# Altium PCB 24V Multiphase Buck.PcbDoc
Units mil, origin at the board's own origin, x right, y up, seen from the top; angles counter-clockwise.
Board outline 3543.31 x 3937.01 mil, 4 copper layers (TOP, L3 - POWER, L2 - GND, BOT), stack 23.756 mil thick; 82 components, 31 nets, 185 pads, 143 vias.
Unrouted connection lines stored in the file: 77.
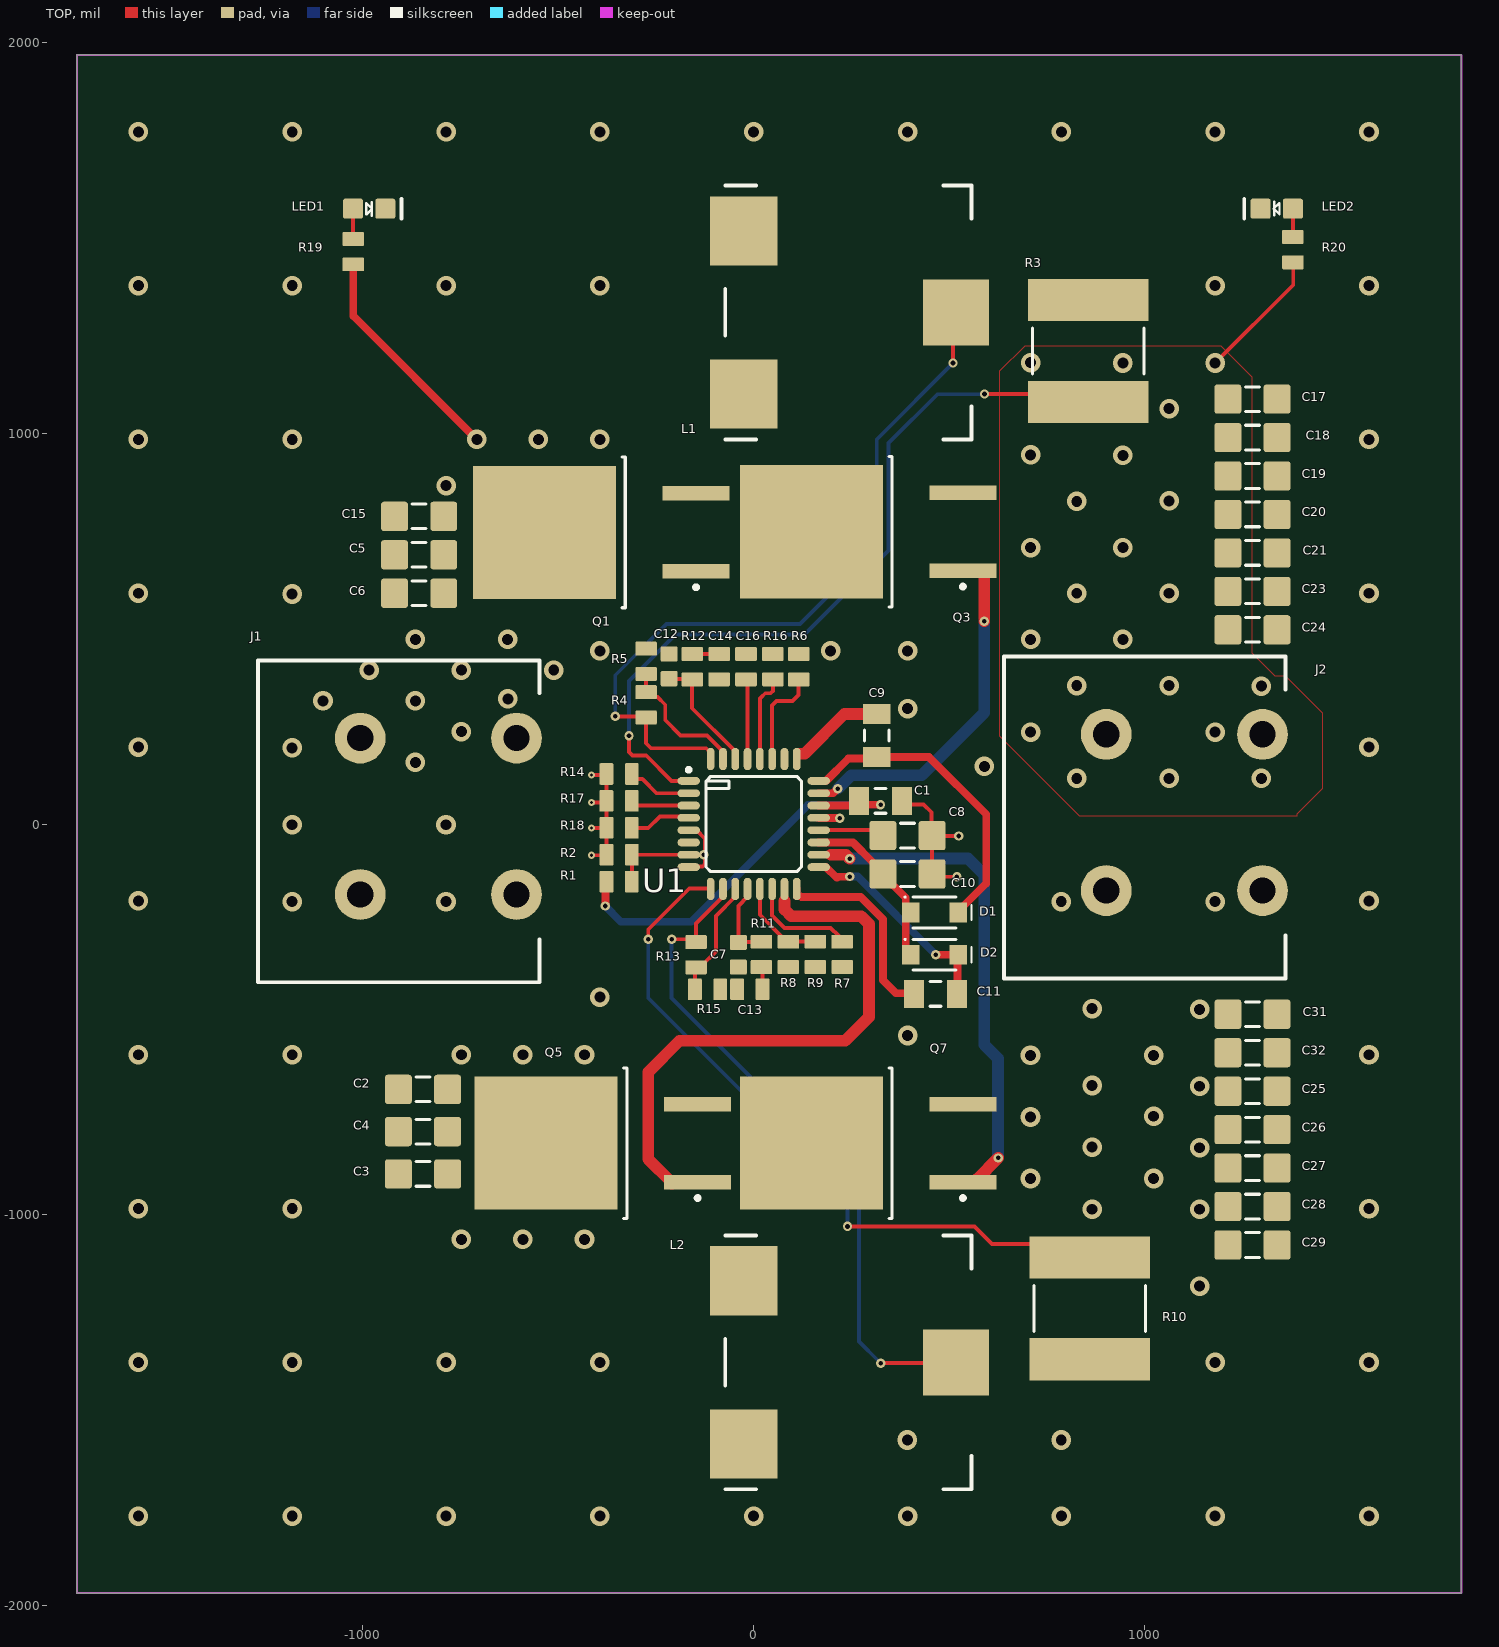
[diagram p0: TOP view]
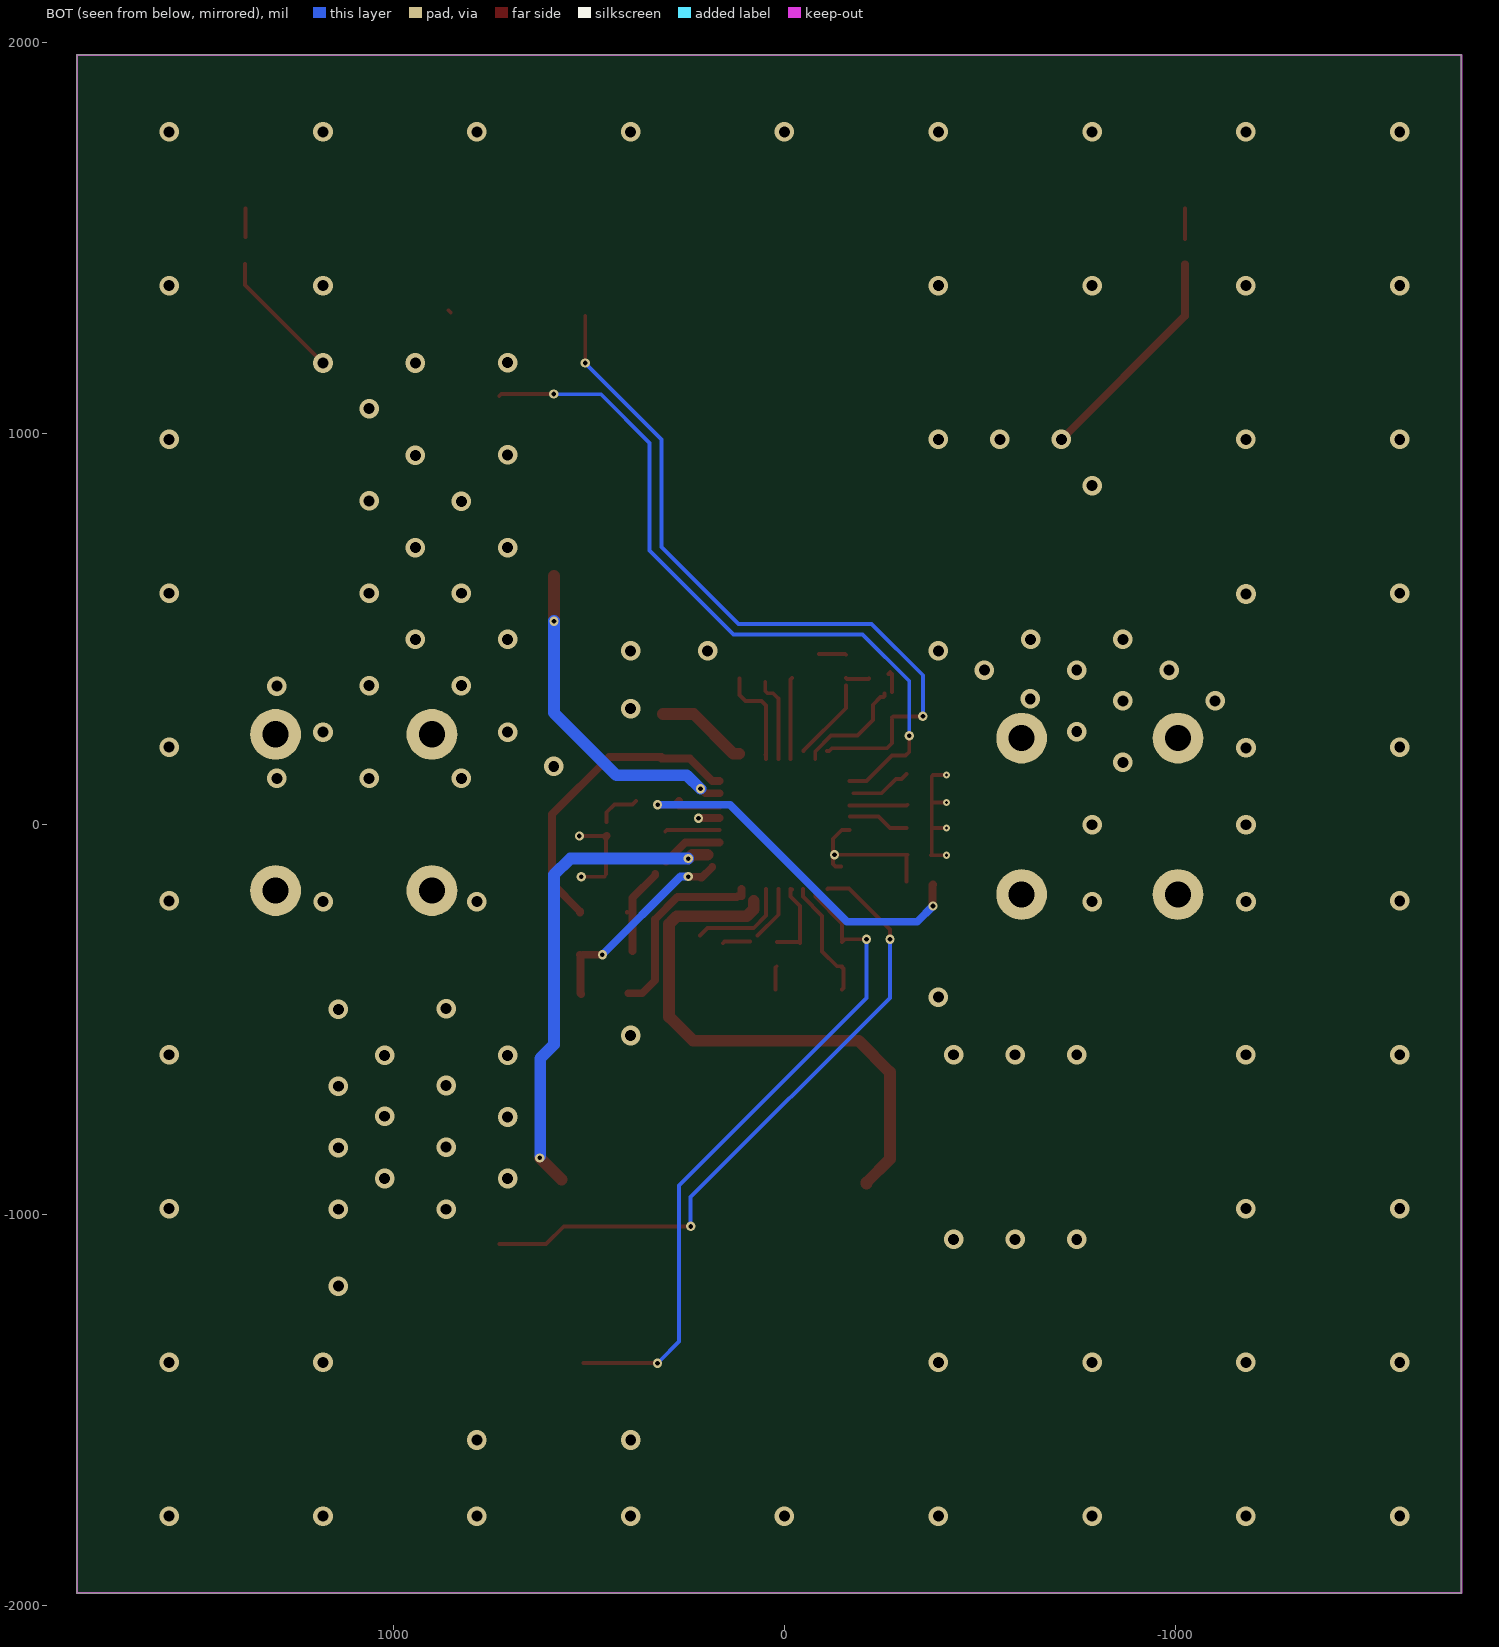
[diagram p1: BOT view, seen from below]
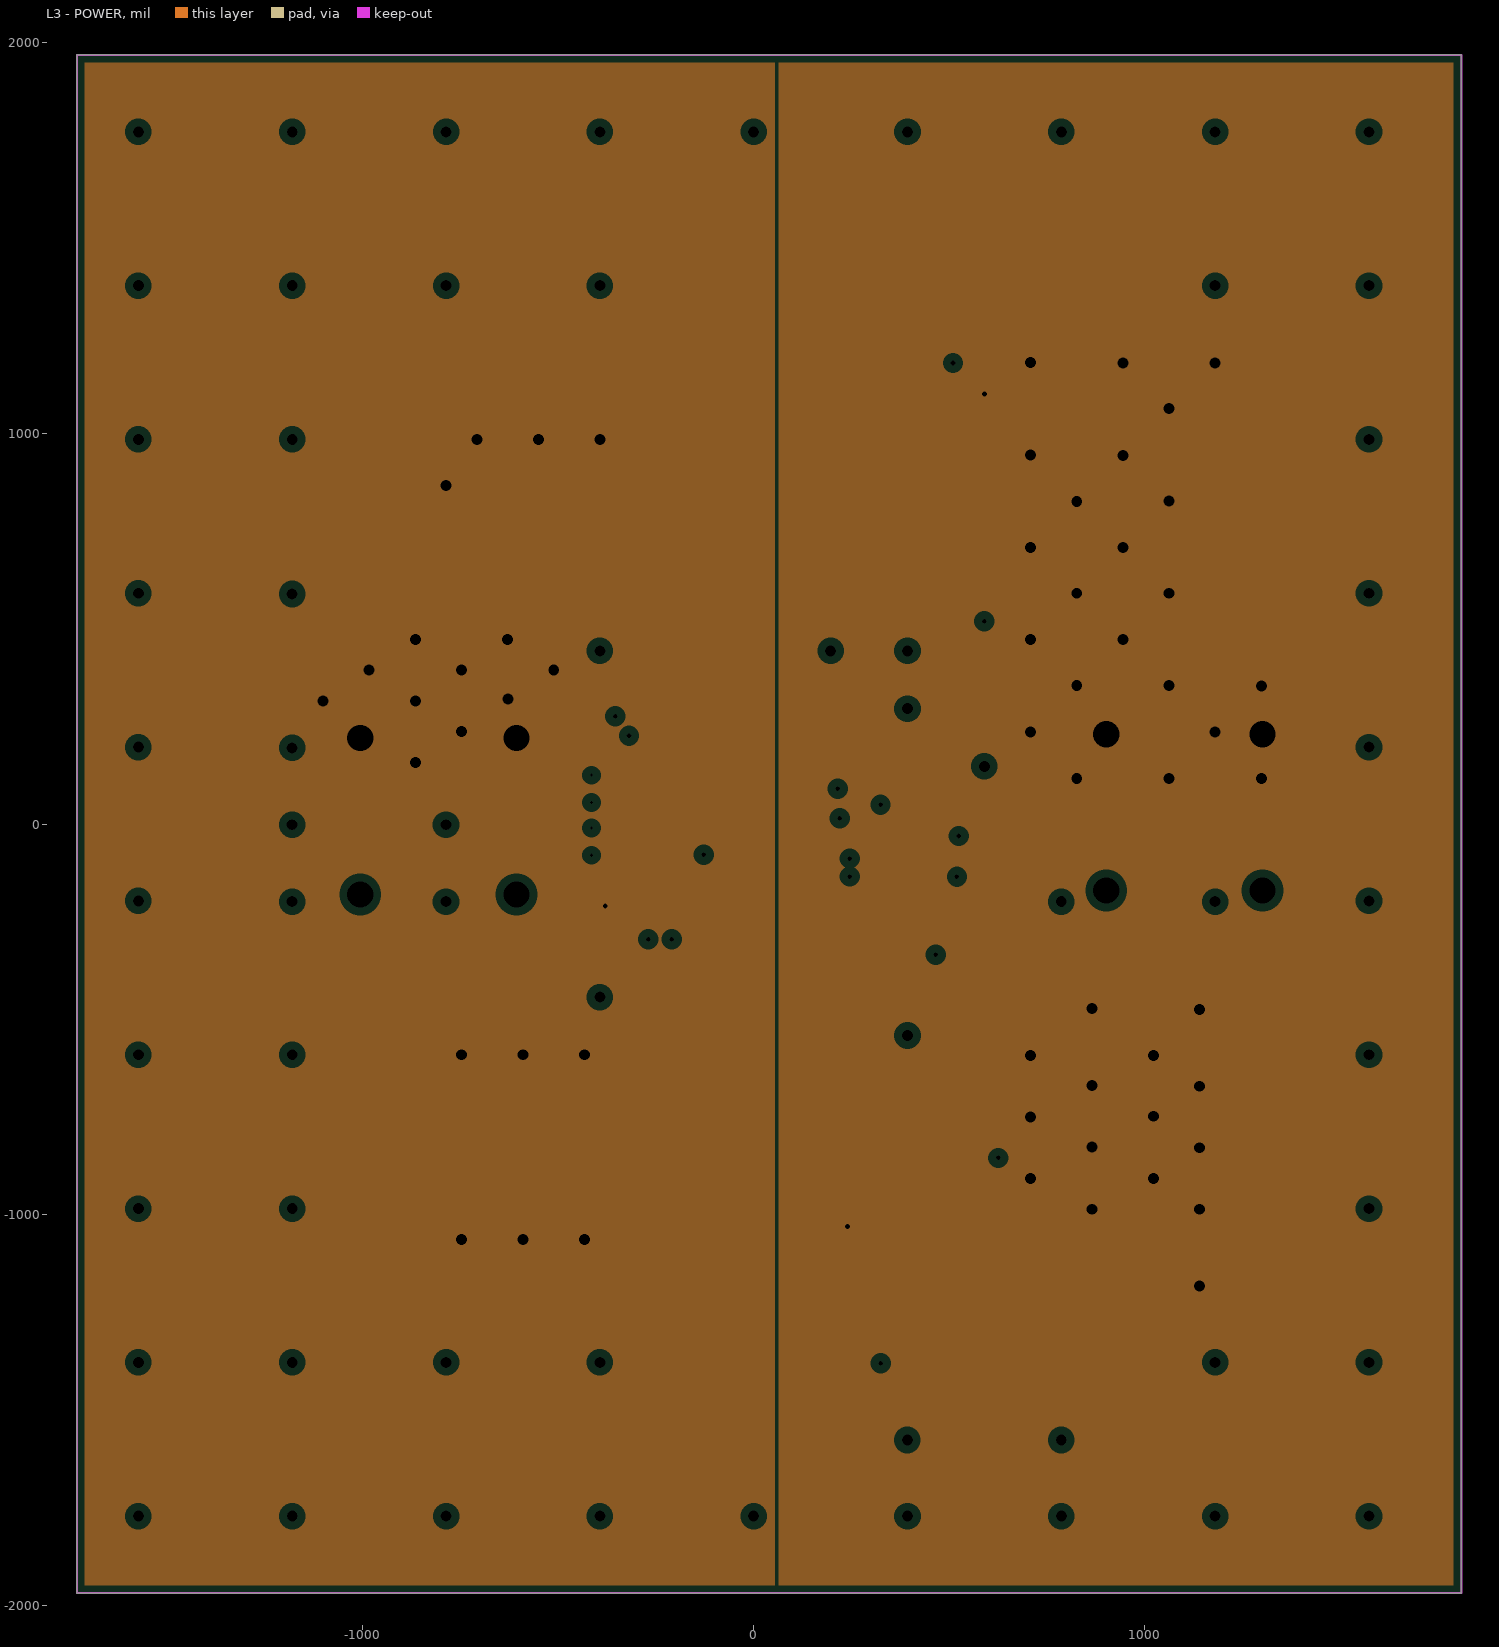
[diagram p2: L3 - POWER, clearances drawn from the general rule]
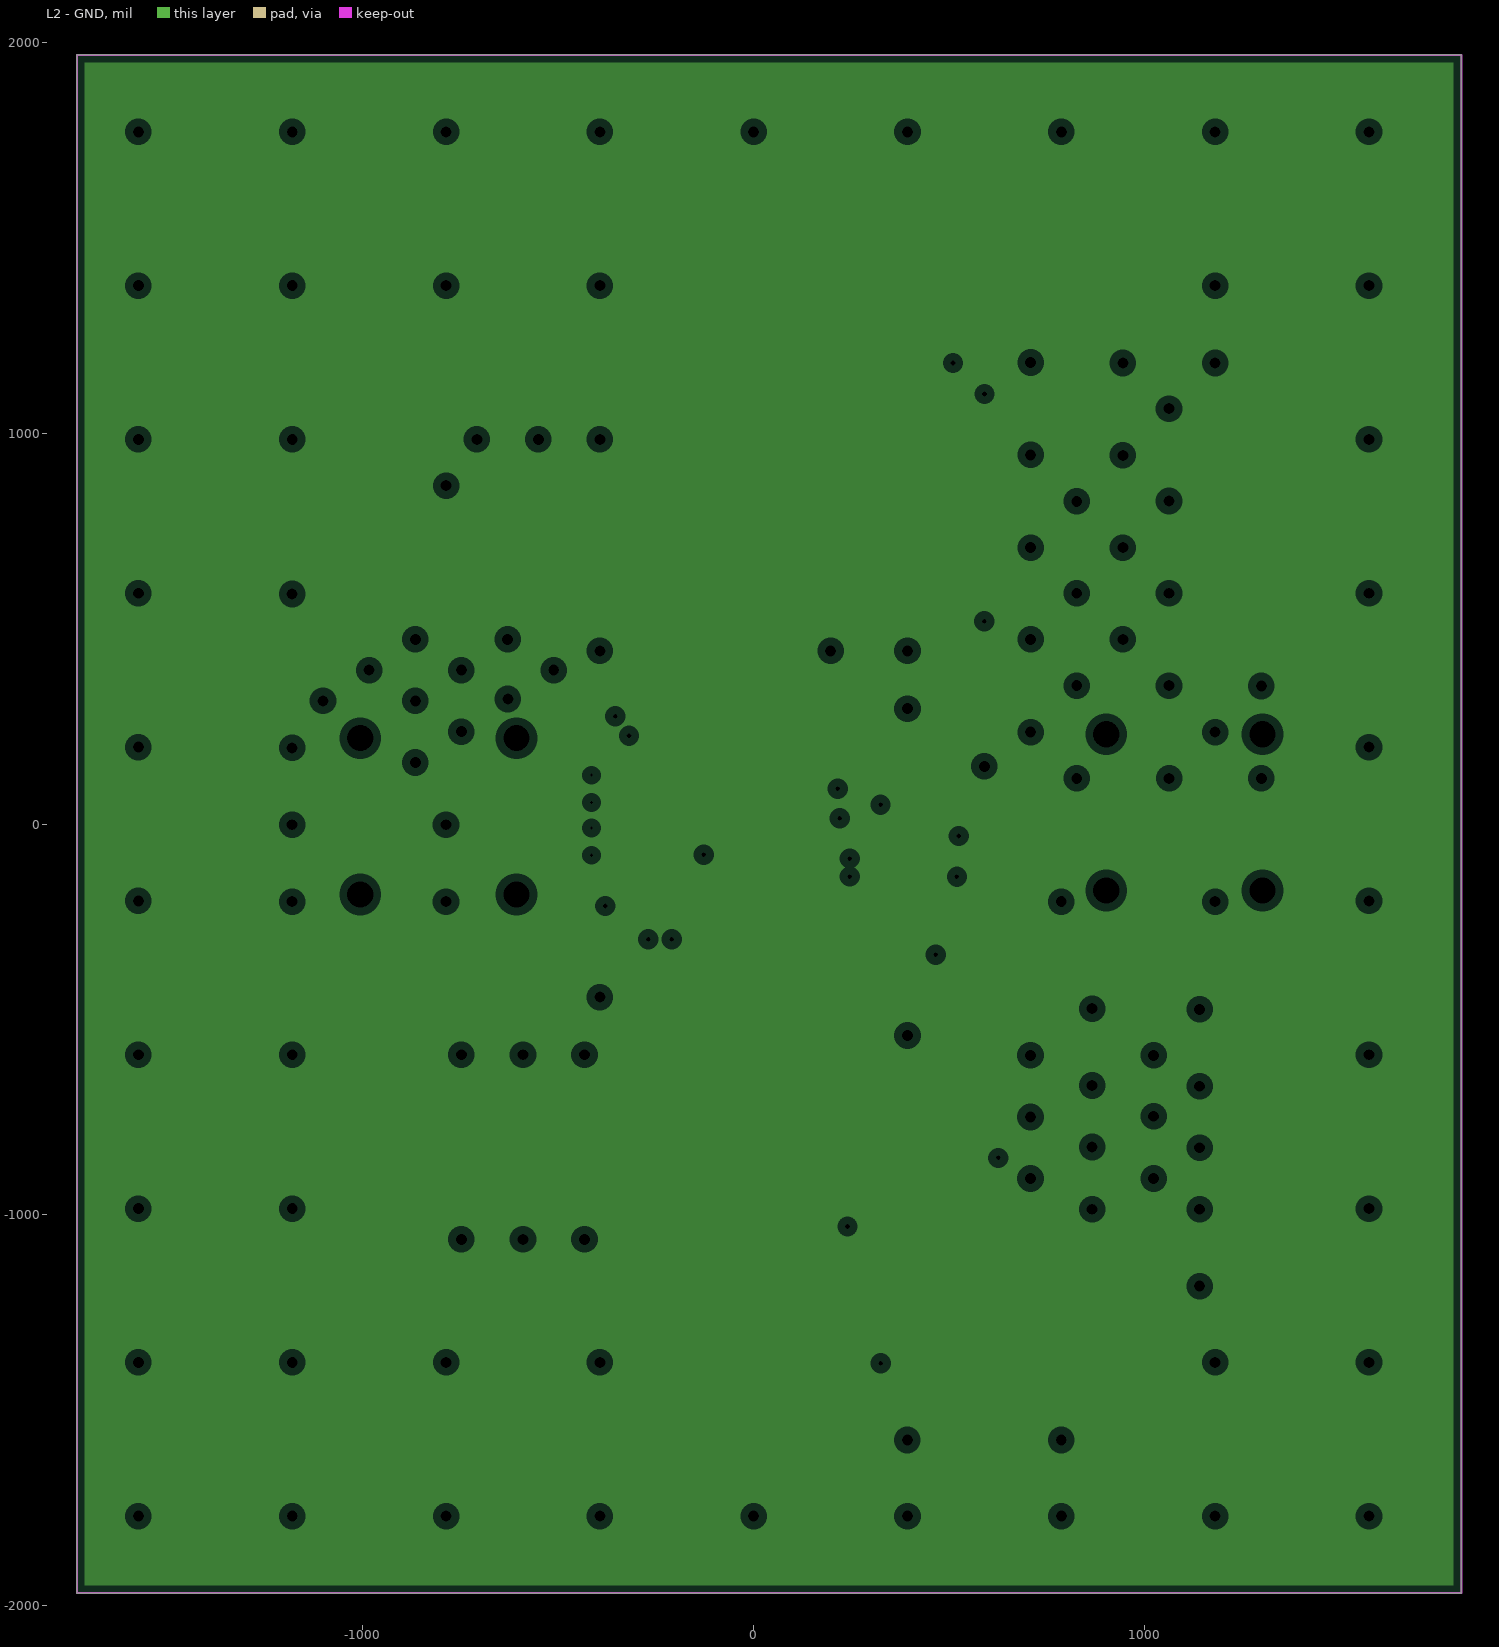
[diagram p3: L2 - GND, clearances drawn from the general rule]

## Layer stack, top to bottom
Top Solder: solder mask 0.4, Solder Resist, Dk 3.5
TOP: signal copper 1.4
Dielectric 2: prepreg 2.8, PP-006, Dk 4.1
L3 - POWER: plane copper 1.378, net (Multiple Nets)
Dielectric 1: dielectric 12.6, FR-4, Dk 4.8
L2 - GND: plane copper 1.378
Dielectric 3: prepreg 2.8, PP-006, Dk 4.1
BOT: signal copper 1.4
Bottom Solder: solder mask 0.4, Solder Resist, Dk 3.5

## Board outline
-1732.28,-1968.5 -1732.28,1968.5 1811.02,1968.5 1811.02,-1968.5

## Design rules (kind name [scope] priority, off if disabled: settings)
BoardOutlineClearance [All] p1: gap=20 ignorepadtopadclearanceinfootprint=FALSE except(5: Text-OutlineEdge Text-CavityEdge Text-CutoutEdge Text-SplitBarrior Text-SplitContinuation; 25: Track-OutlineEdge Track-CavityEdge Track-CutoutEdge Track-SplitBarrior Track-SplitContinuation)
Clearance "High Voltage Internal" [InNetClass('High_Voltage_Internal')  and OnLayer('Power')] p1: gap=20 ignorepadtopadclearanceinfootprint=TRUE
Clearance "High Voltage External" [InNetClass('High_Voltage')  and OnLayer('Signal')] p2: gap=12 ignorepadtopadclearanceinfootprint=TRUE
Clearance Clearance_1 [All] p3: gap=10 ignorepadtopadclearanceinfootprint=TRUE except(0: Arc-Text Track-Text Text-Hole; 5: Track-Track SMDPad-SMDPad Text-Text; 7: SMDPad-Region; 8: Arc-Arc Arc-Track Arc-SMDPad Arc-Hole Track-SMDPad Track-Region Track-Hole SMDPad-THPad SMDPad-Fill SMDPad-Poly SMDPad-Text SMDPad-Hole THPad-Hole Via-Hole Fill-Hole Poly-Hole Region-Region Region-Hole; 20: THPad-THPad Via-Via)
ComponentClearance [All] p1: gap=10 collisioncheckmode=3 verticalgap=200 showdistances=FALSE
DiffPairsRouting [All] p1: maxlimit=10 minlimit=8 mostfreqgap=10 toplayer_minwidth=10 toplayer_maxwidth=10 toplayer_prefwidth=10 bottomlayer_minwidth=10 bottomlayer_maxwidth=10 bottomlayer_prefwidth=10 maxuncoupledlength=500
Height [All] p1: minheight=0 maxheight=50000 prefheight=500
HoleSize [All] p1: absolutevalues=TRUE maxlimit=200 minlimit=10 maxpercent=80.000 minpercent=20.000
HoleToHoleClearance [All] p1: gap=20 allowstackedmicrovias=TRUE
MinimumAnnularRing [All] p1: minimumring=5
MinimumSolderMaskSliver [All] p1: minsoldermaskwidth=3
PlaneClearance [All] p1: clearance=20
PlaneConnect PlaneConnect_highpwr [(InNet('24V') OR InNet('VBAT'))] p1: planeconnectstyle=Direct reliefexpansion=20 reliefentries=4 reliefconductorwidth=10 reliefairgap=10
PlaneConnect PlaneConnect_GNDCON [(InNet('GND') AND (InComponent('J1') OR InComponent('J2')))] p2: planeconnectstyle=Direct reliefexpansion=20 reliefentries=4 reliefconductorwidth=10 reliefairgap=10
PlaneConnect [All] p3: pad.planeconnectstyle=Relief pad.reliefexpansion=20 pad.reliefentries=4 pad.reliefconductorwidth=10 pad.reliefairgap=10 via.planeconnectstyle=Direct via.reliefexpansion=20 via.reliefentries=4 via.reliefconductorwidth=10 via.reliefairgap=10
PolygonConnect PolygonConnect_Via [IsVia] p1: connectstyle=Direct reliefconductorwidth=10 reliefentries=4 polygonreliefangle="90 Angle" airgapwidth=10
PolygonConnect [All] p2: connectstyle=Direct reliefconductorwidth=10 reliefentries=4 polygonreliefangle="90 Angle" airgapwidth=10
RoutingVias [All] p1: holewidth=12 width=24 viastyle="Through Hole" minholewidth=6 minwidth=12 maxholewidth=24 maxwidth=50
SilkToSilkClearance [All] p1: silktosilkclearance=2
SilkToSolderMaskClearance [IsPad] p1: minsilkscreentomaskgap=0.5 clearancetoexposedcopper=TRUE
SolderMaskExpansion [All] p1: expansion=2 istentingtop=FALSE
Width Width_1 [All] p1: maxlimit=100 minlimit=5 preferedwidth=10 minimp=50.000000 maximp=50.000000 favimp=50.000000
20 further rules are at their usual default settings.

## Components (designator, comment, footprint, x,y, rotation, side; value= is the part's Value field where it differs from the comment)
C1 "CAP_1uF_100V_1206" CAPC3216X190X50NL20T25 324.8,59.06 r180 top value=1μF
C2 "CAP_22uF_35V_1206" CAP1206 -846.46,-679.13 r0 top value=22μF
C3 "CAP_22uF_35V_1206" CAP1206 -846.46,-895.67 r0 top value=22μF
C4 "CAP_22uF_35V_1206" CAP1206 -846.46,-787.4 r0 top value=22μF
C5 "CAP_22uF_35V_1206" CAP1206 -856.3,688.98 r0 top value=22μF
C6 "CAP_22uF_35V_1206" CAP1206 -856.3,590.55 r0 top value=22μF
C7 "CAP_82pF_50V_0603" CAP0603 -39.37,-334.65 r90 top value=82pF
C8 "CAP_2.2uF_50V_1206" CAP1206 393.7,-29.53 r180 top value=2.2μF
C9 "CAP_1uF_100V_1206" CAPC3216X190X50NL20T25 314.96,226.38 r270 top value=1μF
C10 "CAP_4.7uF_50V_1206" CAP1206 393.7,-127.95 r180 top value=4.7μF
C11 "CAP_1uF_100V_1206" CAPC3216X190X50NL20T25 465,-435 r0 top value=1μF
C12 "CAP_82pF_50V_0603" CAP0603 -216.54,403.54 r270 top value=82pF
C13 "CAP_0.015uF_50V_0805" CAP0805 -9.84,-423.23 r0 top value=0.015µF
C14 "CAP_0.015uF_50V_0805" CAP0805 -88.58,402.56 r90 top value=0.015µF
C15 "CAP_22uF_35V_1206" CAP1206 -856.3,787.4 r0 top value=22μF
C16 "CAP_6200pF_50V_0805" CAP0805 -19.68,402.56 r270 top
C17 "CAP_22uF_35V_1206" CAP1206 1276.57,1087.52 r180 top value=22μF
C18 "CAP_22uF_35V_1206" CAP1206 1276.57,989.09 r180 top value=22μF
C19 "CAP_22uF_35V_1206" CAP1206 1276.57,890.67 r180 top value=22μF
C20 "CAP_22uF_35V_1206" CAP1206 1276.57,792.24 r180 top value=22μF
C21 "CAP_22uF_35V_1206" CAP1206 1276.57,693.82 r180 top value=22μF
C23 "CAP_NU_1206" CAP1206 1276.57,595.39 r180 top value=NU
C24 "CAP_NU_1206" CAP1206 1276.57,496.97 r180 top value=NU
C25 "CAP_22uF_35V_1206" CAP1206 1276.57,-683.82 r180 top value=22μF
C26 "CAP_22uF_35V_1206" CAP1206 1276.57,-782.24 r180 top value=22μF
C27 "CAP_22uF_35V_1206" CAP1206 1276.57,-880.67 r180 top value=22μF
C28 "CAP_22uF_35V_1206" CAP1206 1276.57,-979.09 r180 top value=22μF
C29 "CAP_22uF_35V_1206" CAP1206 1276.57,-1077.52 r180 top value=22μF
C31 "CAP_NU_1206" CAP1206 1276.57,-486.97 r180 top value=NU
C32 "CAP_NU_1206" CAP1206 1276.57,-585.39 r180 top value=NU
D1 "DIO_SCHOTTKY_100V_1A" SOD-123FL 462.6,-226.38 r0 top
D2 "DIO_SCHOTTKY_100V_1A" SOD-123FL 462.6,-334.65 r0 top
J1 "CON_2POS_SCREW_TERM" CON_2POS_SCREW_TERM_65A -807.09,19.69 r270 top
J2 "CON_2POS_SCREW_TERM" CON_2POS_SCREW_TERM_65A 1102.36,29.53 r270 top
L1 "IND_10uH_33A_SMD" IND_B82559B7103A027 246.06,1309.06 r270 top
L2 "IND_10uH_33A_SMD" IND_B82559B7103A027 246.06,-1377.95 r270 top
LED1 "LED_RED" LED_0805_RED -984.25,1574.8 r0 top
LED2 "LED_RED" LED_0805_RED 1338.58,1574.8 r180 top
MH1 "MOUNTING_HOLE_M3" MOUNTING_HOLE_3mm 3297.24,1889.76 r0 top
MH2 "MOUNTING_HOLE_M3" MOUNTING_HOLE_3mm 3326.77,-1988.19 r0 top
MH3 "MOUNTING_HOLE_M3" MOUNTING_HOLE_3mm -3208.66,1860.24 r0 top
MH4 "MOUNTING_HOLE_M3" MOUNTING_HOLE_3mm -3257.87,-1938.98 r0 top
Q1 "NMOS_150V_114A" NMOS_DPAK263-3-2 -147.64,646.46 r180 top
Q3 "NMOS_150V_114A" NMOS_DPAK263-3-2 535.43,648.03 r180 top
Q5 "NMOS_150V_114A" NMOS_DPAK263-3-2 -143.7,-916.93 r180 top
Q7 "NMOS_150V_114A" NMOS_DPAK263-3-2 535.43,-916.93 r180 top
R1 "RES_191kΩ_0805_1%" RES0805 -344.49,-147.64 r180 top value=191kΩ
R2 "RES_10kΩ_0805_5%" RES0805 -344.49,-78.74 r0 top value=10kΩ
R3 "RES_5mΩ_2728_1%" RES2728 856.3,1210.63 r270 top value=5mΩ
R4 "RES_187kΩ_0805_0.1%" RES0805 -275.59,305.12 r270 top value=187kΩ
R5 "RES_6.49kΩ_0805_1%" RES0805 -275.59,416.34 r270 top value=6.49kΩ
R6 "RES_10kΩ_0805_5%" RES0805 115,402.52 r270 top value=10kΩ
R7 "RES_10kΩ_0805_5%" RES0805 226.38,-333.66 r90 top value=10kΩ
R8 "RES_187kΩ_0805_0.1%" RES0805 88.58,-333.66 r270 top value=187kΩ
R9 "RES_6.49kΩ_0805_1%" RES0805 157.48,-333.66 r90 top value=6.49kΩ
R10 "RES_5mΩ_2728_1%" RES2728 860,-1240 r90 top value=5mΩ
R11 "RES_13.7kΩ_0805_1%" RES0805 19.69,-333.66 r90 top value=13.7kΩ
R12 "RES_13.7kΩ_0805_1%" RES0805 -157.48,402.56 r270 top value=13.7kΩ
R13 "RES_187kΩ_0805_0.1%" RES0805 -147.64,-334.65 r90 top value=187kΩ
R14 "RES_71.5kΩ_0805_1%" RES0805 -344.49,127.95 r0 top value=71.5kΩ
R15 "RES_6.49kΩ_0805_1%" RES0805 -118.11,-423.23 r180 top value=6.49kΩ
R16 "RES_402Ω_0805_1%" RES0805 49.21,402.56 r270 top value=402Ω
R17 "RES_402Ω_0805_1%" RES0805 -344.49,59.06 r0 top value=402Ω
R18 "RES_0Ω_0805" RES0805 -344.49,-9.84 r0 top value=0Ω
R19 "RES_4.7kΩ_0805_5%" RES0805 -1025,1465 r90 top value=4.7kΩ
R20 "RES_2.2kΩ_0805_5%" RES0805 1380,1470 r90 top value=2.2kΩ
TP1 "TESTPOINT_LOOP" TESTPOINT_LOOP 7947.28,-1970.13 r0 top
TP2 "TESTPOINT_LOOP" TESTPOINT_LOOP 8158.28,-1970.13 r0 top
TP3 "TESTPOINT_LOOP" TESTPOINT_LOOP 7486.28,-1970.13 r0 top
TP4 "TESTPOINT_LOOP" TESTPOINT_LOOP 7293.31,-1958.66 r0 top
TP5 "TESTPOINT_LOOP" TESTPOINT_LOOP -2923.23,1082.68 r0 top
TP6 "TESTPOINT_1MM_CIRCLE" TESTPOINT_CIRCLE_1MM 2763.21,-1397.8 r90 top
TP7 "TESTPOINT_1MM_CIRCLE" TESTPOINT_CIRCLE_1MM 3300.93,-1840.71 r90 top
TP8 "TESTPOINT_1MM_CIRCLE" TESTPOINT_CIRCLE_1MM 3070.93,-1840.71 r90 top
TP9 "TESTPOINT_1MM_CIRCLE" TESTPOINT_CIRCLE_1MM 2279.93,-1840.71 r90 top
TP10 "TESTPOINT_1MM_CIRCLE" TESTPOINT_CIRCLE_1MM 5415.28,-1939.13 r90 top
TP11 "TESTPOINT_1MM_CIRCLE" TESTPOINT_CIRCLE_1MM 5155.28,-1939.13 r90 top
TP12 "TESTPOINT_1MM_CIRCLE" TESTPOINT_CIRCLE_1MM 2993.21,-1397.8 r90 top
TP14 "TESTPOINT_1MM_CIRCLE" TESTPOINT_CIRCLE_1MM 2789.93,-1840.71 r90 top
TP15 "TESTPOINT_1MM_CIRCLE" TESTPOINT_CIRCLE_1MM 2509.93,-1840.71 r90 top
TP17 "TESTPOINT_1MM_CIRCLE" TESTPOINT_CIRCLE_1MM 4875.28,-1939.13 r90 top
U1 "MAX17559ACJ+" IC_32-TQFP 0,0 r0 top

## Footprints (in the part's own frame and the unit in brackets; to place one, negate y for a bottom-side part, rotate by r counter-clockwise, add the part's x,y. Pads: shape width x height; smd on the part's side, far side on the other; paste and mask are expansions set on the pad)
CAP0603 [mm]
  rrect20% 1x1.1 smd: 1(-0.8,0) 2(0.8,0)
  body extent -0.87,-0.48 0.88,0.48, height 0.87
CAP0805 [mm] "Chip Capacitor, Body 2.0x1.2mm, Height 0.45mm, IPC Medium Density"
  rrect15% 0.9x1.4 smd: 1(-0.825,0) 2(0.825,0)
  body extent -1.1,-0.73 1.1,0.73, height 1.39
CAP1206 [mm] "Chip Capacitor, Body 3.2x1.6mm, Height 0.55mm, IPC Medium Density"
  rrect20% 1.75x1.9 smd: 1(-1.6,0) 2(1.6,0)
  silkscreen extent -0.45,-0.8 0.45,0.8, body extent -1.7,-0.9 1.7,0.9, height 0.88
CAPC3216X190X50NL20T25 [mm] "Chip Capacitor, 2-Leads, Body 3.20x1.60mm, IPC Medium Density"
  rect 1.3x1.8 smd: 1(-1.4,0) 2(1.4,0)
  silkscreen extent -0.35,-0.8 0.35,0.8, body extent -1.6,-0.9 1.6,0.9, height 1.59
CON_2POS_SCREW_TERM_65A [mm]
  round 3.3 hole 1.7: 1(-5.08,5.08) 1(-5.08,-5.08) 2(5.08,5.08) 2(5.08,-5.08)
  silkscreen extent -10.13,-11.72 10.79,6.58, body extent -10.13,-11.72 10.79,6.58, height 28.5
IC_32-TQFP [mm] "CQFP, 32-Leads, Body 9.00x9.00mm, Pitch 0.80mm, IPC Medium Density"
  oval 1.46x0.5 smd: 1(-4.225,2.8) 2(-4.225,2) 3(-4.225,1.2) 4(-4.225,0.4) 5(-4.225,-0.4) 6(-4.225,-1.2) 7(-4.225,-2) 8(-4.225,-2.8) 17(4.225,-2.8) 18(4.225,-2) 19(4.225,-1.2) 20(4.225,-0.4) 21(4.225,0.4) 22(4.225,1.2) 23(4.225,2) 24(4.225,2.8)
  oval 0.5x1.46 smd: 9(-2.8,-4.225) 10(-2,-4.225) 11(-1.2,-4.225) 12(-0.4,-4.225) 13(0.4,-4.225) 14(1.2,-4.225) 15(2,-4.225) 16(2.8,-4.225) 25(2.8,4.225) 26(2,4.225) 27(1.2,4.225) 28(0.4,4.225) 29(-0.4,4.225) 30(-1.2,4.225) 31(-2,4.225) 32(-2.8,4.225)
  silkscreen extent -4.35,-3.1 3.1,3.65, body extent -4.6,-4.6 4.6,4.6, height 1.15
IND_B82559B7103A027 [mm]
  rect 4.5x4.4 smd: 1(-5.3,-6.9) 1(5.3,-6.9)
  rect 4.3x4.3 smd: 2(0,6.9)
  silkscreen extent -8.25,-8.1 8.25,7.9, body extent -8.25,-8.1 8.25,7.9, height 10.75
LED_0805_RED [mm] "SMD, 2-Leads, Body 2x1.25mm"
  rrect20% 1.3x1.3 smd: 1(-1.05,0) 2(1.05,0)
  silkscreen extent -0.18,-0.64 2.11,0.64, body extent -1,-0.62 1,0.63, height 1.12
MOUNTING_HOLE_3mm [mm] "3mm Hole"
  round 4.5 hole 3.2 mask+0.3: 0(0,0)
NMOS_DPAK263-3-2 [mm] "D2-PAK, 3-Pads, Body 7.36x8.26mm (max), IPC Medium Density"
  rect 4.35x0.95 smd: 1(0,0) 3(0,-5.08)
  rect 9.3x8.65 smd: 2(9.85,-2.54)
  silkscreen extent -0.13,-7.44 4.8,2.36, body extent -0.83,-7.44 14.41,2.36, height 4.57
RES0805 [mm] "Chip Resistor, 2-Leads, Body 2.00x1.25mm, IPC High Density"
  rrect15% 0.9x1.4 smd: 1(-0.825,0) 2(0.825,0)
  body extent -1,-0.62 1,0.63, height 0.61
RES2728 [mm] "Chip Resistor, 2-Leads, Body 6.71x7.19mm, IPC Medium Density"
  rect 2.75x7.82 smd: 1(-3.31,0) 2(3.31,0)
  silkscreen extent -1.5,-3.63 1.5,3.62, body extent -3.48,-3.72 3.48,3.72, height 1.24
SOD-123FL [mm] "SODFL, 2-Leads, Body 1.80x3.60mm, IPC Medium Density"
  rect 1.15x1.3 smd: 1(-1.55,0) 2(1.55,0)
  silkscreen extent -1.95,-1 2.4,1.05, body extent -1.4,-1 1.4,1, height 1
TESTPOINT_CIRCLE_1MM [mm]
  round 1 smd: 1(0,0)
TESTPOINT_LOOP [mm]
  round 2.54 hole 1.02: 1(0,0)
  body extent -1.27,-1.27 1.27,1.27, height 4.57

## Part data
C1 C9 C11: "CAP CER 1UF 100V X7R 1206", Package=1206, Supplier Part Number 1=490-16468-1-ND, Voltage Rating=100V, Mounting Type=SMD, Supplier 1=Digi-Key
C2 C3 C4 C5 C6 C15 C17 C18 C19 C20 C21 C25 C26 C27 C28 C29: "CAP CER 22UF 35V X5R 1206", Dielectric=X5R, Manufacturer 1="TDK Corporation", Manufacturer Part Number 1=C3216X5R1V226M160AC, Package/Footprint=1205, Supplier Part Number 1=445-8045-1-ND, Voltage Rating=35V, Mounting Type="Surface Mount", Supplier 1=Digi-Key
C7 C12: "CAP CER 82PF 50V C0G/NPO 0603", Dielectric="C0G, NP0", Manufacturer 1=Yageo, Manufacturer Part Number 1=CC0603JRNPO9BN820, Supplier Part Number 1=311-1068-1-ND, Voltage Rating=50V, Supplier 1=Digi-Key
C8: "CAP CER 2.2UF 50V X7R 1206", Dielectric=X7R, Manufacturer 1="Murata Electronics", Manufacturer Part Number 1=GCM31CR71H225KA55L, Supplier Part Number 1=490-4796-1-ND, Voltage Rating=50V, Supplier 1=Digi-Key
C10: "CAP CER 4.7UF 50V X7R 1206", Dielectric=X7R, Manufacturer 1=Murata, Manufacturer Part Number 1=GRM31CR71H475KA12L, Package=1206, Supplier Part Number 1=490-6521-1-ND, Voltage Rating=50V, Mounting Type=SMD, Supplier 1=Digi-Key
C13 C14: "CAP CER 0.015UF 50V C0G 0805", Manufacturer 1="TDK Corporation", Manufacturer Part Number 1=CGA4F2C0G1H153J085AA, Package=0805, Supplier Part Number 1=445-6948-1-ND, Voltage Rating=50V, Supplier 1=Digi-Key
C16: "CAP CER 6200PF 50V C0G/NP0 0805", Capacitance=6200pF, Manufacturer 1="Murata Electronics", Manufacturer Part Number 1=GRM2195C1H622JA01D, Package/Footprint=0805, Supplier Part Number 1=490-1637-1-ND, Voltage Rating=50V, Supplier 1=Digi-Key
C23 C24 C31 C32: "PLACEHOLDER CAPACITOR", Package=1206, Mounting Type="Surface Mount"
D1 D2: "DIODE SCHOTTKY 100V 1A SOD-123F", Manufacturer 1="SMC Diode Solutions", Manufacturer Part Number 1=DSS110U, Package/Footprint=SOD-123F, Supplier Part Number 1=1655-DSS110UCT-ND, Mounting Type=SMD, Supplier 1=Digi-Key, Vr (Max)=100V
J1 J2: library part CON_2POS_SCREW_TERM_65A, "PCB TERMINAL BLOCKS RISING CLAMP", Manufacturer 1="Amphenol Anytek", Manufacturer Part Number 1=VP0265840000G, Package/Footprint=TERMINAL, Supplier Part Number 1=1818-VP0265840000G-ND, Mounting Type=TH, Supplier 1=Digi-Key
L1 L2: "FIXED IND 10UH 33A 1.92 MOHM SMD", Current Rating=33A, Inductance=10μH, Manufacturer 1="EPCOS - TDK Electronics", Manufacturer Part Number 1=B82559B7103A027, Supplier Part Number 1=495-B82559B7103A027CT-ND, Supplier 1=Digi-Key
LED1 LED2: "LED RED DIFFUSED 0805 SMD", Forward Voltage Drop=2V, Manufacturer 1=OSRAM, Manufacturer Part Number 1="LS R976-NR-1", Package/Footprint=0805, Supplier Part Number 1=475-1278-1-ND, Mounting Type=SMD, Supplier 1=Digi-Key
Q1 Q3 Q5 Q7: "MOSFET N-CH 150V 114A TO263-3", Manufacturer 1="Infineon Technologies", Manufacturer Part Number 1=IPB073N15N5ATMA1, Package/Footprint="TO-263-3, D²Pak", Supplier Part Number 1=IPB073N15N5ATMA1CT-ND, Id=114A, Mounting Type=SMD, Supplier 1=Digi-Key, Vdss=150V, Vgs (Max)=±20V
R1: "RES 191K OHM 1% 1/8W 0805", Manufacturer 1=Yageo, Manufacturer Part Number 1=RC0805FR-07191KL, Package/Footprint=0805, Supplier Part Number 1=311-191KCRTR-ND, Mounting Type=SMD, Supplier 1=Digi-Key
R2 R6 R7: "RES 10K OHM 5% 1/8W 0805", LCSC Part #=C17414, Manufacturer 1="Panasonic Electronic Components", Manufacturer Part Number 1=ERJ-6GEYJ103V, Package/Footprint=0805, Supplier Part Number 1=P10KACT-ND, Mounting Type=SMD, Supplier 1=Digi-Key
R3 R10: "RES 0.005 OHM 1% 4W 2827", Manufacturer 1="Stackpole Electronics Inc", Manufacturer Part Number 1=CSSH2728FT5L00, Package/Footprint=2728, Supplier Part Number 1=CSSH2728FT5L00CT-ND, Mounting Type=SMD, Supplier 1=Digi-Key
R4 R8 R13: "RES 187K OHM 0.1% 1/8W 0805", Manufacturer 1=Yageo, Manufacturer Part Number 1=RT0805BRD07187KL, Package/Footprint=0805, Supplier Part Number 1=13-RT0805BRD07187KLCT-ND, Mounting Type=SMD, Supplier 1=Digi-Key
R5 R9 R15: "RES 6.49K OHM 1% 1/8W 0805", Manufacturer 1=Yageo, Manufacturer Part Number 1=RC0805FR-076K49L, Package/Footprint=0805, Supplier Part Number 1=311-6.49KCRCT-ND, Mounting Type=SMD, Supplier 1=Digi-Key
R11 R12: "RES 13.7K OHM 1% 1/8W 0805", LCSC Part #=C17448, Manufacturer 1=Vishay, Manufacturer Part Number 1=CRCW080513K7FKEA, Package=0805, Supplier Part Number 1=541-13.7KCCT-ND, Mounting Type=SMD, Supplier 1=Digi-Key
R14: "RES 71.5K OHM 1% 1/8W 0805", Manufacturer 1=Yageo, Manufacturer Part Number 1=RC0805FR-0771K5L, Package/Footprint=0805, Supplier Part Number 1=311-71.5KCRCT-ND, Mounting Type=SMD, Supplier 1=Digi-Key
R16 R17: "RES 402 OHM 1% 1/8W 0805", LCSC Part #=C17681, Manufacturer 1="Stackpole Electronics Inc", Manufacturer Part Number 1=RMCF0805FT402R, Package/Footprint=0805, Supplier Part Number 1=RMCF0805FT402RCT-ND, Mounting Type=SMD, Supplier 1=Digi-Key
R18: "RES 0 OHM JUMPER 1/8W 0805", Manufacturer 1=YAGEO, Manufacturer Part Number 1=RC0805JR-070RL, Package/Footprint=0805, Supplier Part Number 1=311-0.0ARCT-ND, Mounting Type=SMD, Supplier 1=Digi-Key
R19: "RES 4.7K OHM 5% 1/8W 0805", LCSC Part #=C17673, Manufacturer 1=Yageo, Manufacturer Part Number 1=RC0805JR-074K7L, Package=0805, Supplier Part Number 1=311-4.7KARCT-ND, Mounting Type=SMD, Supplier 1=Digi-Key
R20: "RES 2.2K OHM 5% 1/8W 0805", Manufacturer 1="Vishay Dale", Manufacturer Part Number 1=CRCW08052K20JNEAC, Package=0805, Supplier Part Number 1=541-4169-1-ND, Tolerance=5%, Supplier 1=Digi-Key
TP1 TP2 TP3 TP4 TP5: "TESTPOINT THRUHOLE", Manufacturer 1="Keystone Electronics", Manufacturer Part Number 1=5002, Package/Footprint=TH, Supplier Part Number 1=36-5002-ND, Mounting Type=TH, Supplier 1=Digi-Key
TP6 TP7 TP8 TP9 TP10 TP11 TP12 TP14 TP15 TP17: "TESTPOINT 1MM CIRCLE"
U1: "IC REG CTRLR BUCK 32TQFP", Manufacturer 1=Maxim, Package/Footprint=32-TQFP, Supplier Part Number 1=MAX17559ACJ+-ND, Manufacturer Part Number=MAX17559ACJ+, Mounting Type=SMD, Supplier 1=Digi-Key

## Via types
v1: diameter 50, hole 28, TOP to BOT, 97 vias
v2: diameter 50, hole 28, TOP to BOT, tented both sides, 22 vias
v3: diameter 24, hole 12, TOP to BOT, tented both sides, 10 vias
v4: diameter 23.62, hole 11.81, TOP to BOT, tented both sides, 10 vias
v5: diameter 18, hole 8, TOP to BOT, tented both sides, 4 vias

## Nets (pads, with @x,y where several pads share a name; then routed paths per layer and width w, separated by ;. In a path a pad name is that pad's centre, name@x,y a point inside that pad or via, vN(x,y) a via of type N, cw(c..) or ccw(c..) an arc to the next point about the centre after c; other vN are vias at no path point)
24V: C8.2 C17.2 C18.2 C19.2 C20.2 C21.2 C23.2 C24.2 C25.2 C26.2 C27.2 C28.2 C29.2 C31.2 C32.2 J2.1 R3.2 R8.2 R10.2 R20.1 TP2.1 U1.1 U1.9 U1.20 | length 4031
  TOP w10: v3@-320,225 -319.33,224.33 -319.33,184.33 -310,175 -275,175 -210.24,110.24 U1.1 ; v3@-270,-290 -270,-270 -165,-165 -111.57,-165 U1.9 ; U1.20 301.4,-15.75 305.12,-19.46 C8.2@305.12,-19.69 ; v3(240,-1030) 565,-1030 610,-1075 R10.2@730,-1075 ; v3(590.67,1100.59) 724.41,1100.59 R3.2@730,1095 ; v2(1181.14,1179.92) 1381,1379.78 R20.1@1381,1433
  BOT w10: v3(-319.33,225.59) -319.33,365.67 -200,485 130,485 345,700 345,975 470,1100 v3@590,1100 ; v3(-270,-295) -270,-445 240,-955 v3@240,-1025
  other v1: 1141.54,-1182.95 865.94,-986.1 1141.54,-986.1 708.46,-907.36 1023.43,-907.36 1141.54,-828.62 866.14,-826.77 708.46,-749.88 1023.62,-748.03 1141.54,-671.14 866.14,-669.29 708.46,-592.4 1023.43,-592.4 1141.54,-474.29 866.14,-472.44
  other v2: 826.81,116.93 1063.03,116.93 1299.25,116.93 708.7,235.04 1181.14,235.04 1299.25,353.15 826.77,354.33 1062.99,354.33 708.66,472.44 944.88,472.44 826.77,590.55 1062.99,590.55 708.7,707.48 944.92,707.48 826.81,825.59 1062.99,826.77 944.92,943.7 708.66,944.88 1062.99,1062.99 944.92,1179.92 708.66,1181.1
BST1: C9.2 D1.2 U1.24 | length 793.9
  TOP w20: U1.24 184.92,110.24 242.01,167.32 C9.2@314.96,167.32 ; C9.2 448.82,171.26 595,25.08 595,-152.05 523.62,-223.43 D1.2
BST2: C11.2 D2.2 U1.17 | length 527.5
  TOP w20: U1.17@185.08,-110.39 212.48,-137.8 214.02,-137.8 216.6,-135.22 245.37,-135.22 v4(246.06,-134.53) ; v4(466.06,-334.53) 466.12,-334.59 514.59,-334.59 D2.2@515,-335 ; C11.2@520,-435 521.87,-433.13 521.87,-336.4 D2.2
  BOT w20: v4(246.06,-134.53) 266.06,-134.53 v4(466.06,-334.53)
COMP1: C12.2 R12.2 U1.30 | length 272.7
  TOP w10: C12.2 -215.7,371.21 -160.29,371.21 R12.2@-157.48,374.02 ; R12.2@-157.48,354.33 -157.48,296.28 -49.21,188.01 U1.30@-49.21,187.01
COMP2: C7.2 R11.2 U1.12 | length 214.4
  TOP w10: U1.12@-19.68,-167.32 U1.12@-15.75,-171.26 ; U1.12 U1.12@-15.75,-171.26 ; R11.2@19.69,-302.17 19.54,-302.31 -36.56,-302.31 -39.37,-305.12 C7.2 -39.37,-209.67 -15.75,-186.04 U1.12@-15.75,-171.26
DH1: Q1.1 TP6.1 U1.26
DH2: Q5.1 TP9.1 U1.15 | length 1425.2
  TOP w30: Q5.1@-210,-920 -210,-917.56 -270,-857.56 -270,-635 -190,-555 234,-555 295.28,-493.72 295.28,-255.91 285.42,-246.05 275.59,-236.22 96.31,-236.22 78.74,-218.65 78.74,-196.85
DL1: Q3.1 TP8.1 U1.23 | length 860
  TOP w20: U1.23 166.5,78.9 202.92,78.9 214.02,90 v4(215,90) ; Q3.1@589.8,634.8 Q3.1@590,635
  TOP w30: v4(589.8,519.21) Q3.1@589.8,634.8
  BOT w30: v4(215,90) 250,125 430,125 590,285 v4@590,520
DL2: Q7.1 TP11.1 U1.18 | length 1227.9
  TOP w30: 196.85,-78.74 236.22,-78.74 v4(246.06,-88.58) ; Q7.1@570,-910 570.59,-910 v4(626.06,-854.53)
  BOT w30: v4(246.06,-88.58) 548.58,-88.58 590,-130 590,-565 625,-600 v4@625,-850
EN: R1.1 R2.2 U1.5 U1.7 U1.8 | length 404.7
  TOP w10: R1.1 -312.01,-81.69 -314.96,-78.74 U1.7 v3(-127.95,-78.74) ; U1.5 -146.63,-15.75 -124.6,-37.78 v3@-124.6,-75.39 ; U1.8@-144.65,-108.38 -130.46,-108.38 -124.6,-102.53 v3@-124.6,-75.39 ; v3(-127.95,-78.74) v3@-124.6,-75.39 ; v3(-127.95,-78.74) v3@-124.6,-75.39
FB1: R4.1 R5.2 TP14.1 U1.31 | length 367.3
  TOP w10: R4.1 R5.2 -265.75,383.86 R5.2@-270.67,388.78 ; R4.1@-255.91,334.65 -255.91,327.76 -253.03,324.88 -246.14,324.88 -226.38,305.12 -226.38,265.75 -187.01,226.38 -119.07,226.38 U1.31@-78.74,186.04 ; U1.31 U1.31@-78.74,186.04 ; U1.31@-78.74,167.32 U1.31@-78.74,186.04
FB2: R13.1 R15.2 TP17.1 U1.11 | length 306.4
  TOP w10: R15.2@-147.64,-423.23 -150.59,-420.28 -150.59,-370.08 R13.1 ; R13.1@-147.64,-364.17 -134.84,-364.17 -96.49,-325.82 -96.49,-235.29 -47.24,-186.04 U1.11 U1.11@-47.88,-166.98
GND: C1.1 C2.1 C3.1 C4.1 C5.1 C6.1 C7.1 C8.1 C10.1 C12.1 C13.1 C14.1 C15.1 C16.1 C17.1 C18.1 C19.1 C20.1 C21.1 C23.1 C24.1 C25.1 C26.1 C27.1 C28.1 C29.1 C31.1 C32.1 J1.2 J2.2 LED1.2 LED2.2 Q3.3 Q7.3 R2.1 R5.1 R9.1 R14.1 R15.1 R16.1 R17.1 R18.1 TP3.1 TP4.1 TP5.1 U1.6 U1.21 | length 743.9
  TOP w10: v5(-415,-80) R2.1@-375,-80 ; v5(-415,-10) R18.1@-380,-10 ; v5(-415,55) R17.1@-380,55 ; v5(-415,125) -380,125 -376.97,121.97 R17.1 R18.1 R2.1 ; C1.1 388.98,50 435,50 455,30 C8.1@455,5 ; C10.1 C8.1@456.69,-31.69 ; C8.1 457.95,-30.79 v4@524.21,-30.79 ; C10.1@460,-135 v4(520,-135)
  TOP w20: U1.21 166.5,15.59 219.41,15.59 v4(220,15) ; C8.1@455,-30 C8.1@456.69,-31.69 ; v4@524.21,-30.79 v4@525,-30
  other v1: -1574.8,-1771.65 -1181.1,-1771.65 -787.4,-1771.65 -393.7,-1771.65 0,-1771.65 393.7,-1771.65 787.4,-1771.65 1181.1,-1771.65 1574.8,-1771.65 393.5,-1576.65 787.2,-1576.65 -1574.8,-1377.95 -1181.1,-1377.95 -787.4,-1377.95 -393.7,-1377.95 1181.1,-1377.95 1574.8,-1377.95 -1574.8,-984.25 -1181.1,-984.25 1574.8,-984.25 -1574.8,-590.55 -1181.1,-590.55 1574.8,-590.55 393.7,-541.34 -393.7,-442.91 -1181.3,-198.7 -787.6,-198.7 787.2,-198.7 1180.91,-198.7 -1574.8,-196.85 1574.8,-196.85 -1181.3,-1.85 -787.6,-1.85 590.55,147.64 -1181.3,195 -1574.8,196.85 1574.8,196.85 393.7,295.28 -393.7,442.91 196.85,442.91 393.7,442.91 -1181.3,588.7 -1574.8,590.55 1574.8,590.55 -1574.8,984.25 -1181.1,984.25 1574.8,984.25 -1574.8,1377.95 -1181.1,1377.95 -787.4,1377.95 -393.7,1377.95 1181.1,1377.95 1574.8,1377.95 -1574.8,1771.65 -1181.1,1771.65 -787.4,1771.65 -393.7,1771.65 0,1771.65 393.7,1771.65 787.4,1771.65 1181.1,1771.65 1574.8,1771.65
  other v4: 524.8,-30.79
ILIM1: R16.2 U1.28 | length 219.8
  TOP w10: U1.28 15.75,320.87 19.69,324.8 29.53,334.65 43.35,334.65 49.21,340.5 R16.2@49.21,364.17
ILIM2: R17.2 U1.3 | length 149.4
  TOP w10: R17.2@-314.96,49.21 -312.99,47.24 U1.3
ILIMSEL: R18.2 U1.4 | length 156.9
  TOP w10: R18.2 -269.84,-9.84 -240.32,19.69 U1.4@-167.32,19.69
LX1: C9.1 L1.1 Q1.3 Q3.2 TP7.1 U1.25 | length 237.6
  TOP w30: U1.25@115.39,180.08 130.87,180.08 232.28,281.5 C9.1@311.02,281.5
LX2: C11.1 L2.1 Q5.3 Q7.2 TP10.1 U1.16 | length 502.5
  TOP w20: U1.16 110.24,-184.92 110.39,-185.08 120.02,-185.08 121.95,-187.01 274.01,-187.01 331,-244 331,-399.9 364.17,-433.07 C11.1@400,-433.07
NetC13_2: C13.2 R11.1 | length 60.3
  TOP w10: R11.1@19.69,-364.17 22.64,-367.13 C13.2
NetC14_2: C14.2 R12.1 | length 69.7
  TOP w10: R12.1@-157.48,433.07 -155.51,435.04 C14.2
NetL1_2: L1.2 R3.1 R4.2 TP12.1 U1.32 | length 1907.1
  TOP w10: v3(-354.33,275.59) -278.54,275.59 R4.2 ; R4.2@-275.59,265.75 -275.59,206.69 -262.8,193.9 -121.52,193.9 -114.63,187.01 U1.32@-108.27,187.01 ; v3(510,1180) L1.2@510,1300 ; R3.1@854.06,1309.06 R3.1@860,1315
  BOT w10: v3(-354.33,275.59) -354.33,380.67 -223.19,511.81 118.11,511.81 314.96,708.66 314.96,984.25 v3@511.81,1181.1
NetL2_2: L2.2 R10.1 R13.2 TP15.1 U1.10 | length 1712.3
  TOP w10: v3(-210,-295) -154.8,-295 R13.2 ; R13.2@-147.64,-295.28 -147.64,-254.94 -78.74,-186.04 U1.10 ; v3(325,-1380) L2.2@515,-1380
  BOT w10: v3(-210,-295) -210,-445 270,-925 270,-1325 v3@320,-1375
NetLED1_1: LED1.1 R19.2 | length 78
  TOP w10: R19.2 -1025.59,1498.07 -1025.59,1574.41 LED1.1@-1025,1575
NetLED2_1: LED2.1 R20.2 | length 72.6
  TOP w10: R20.2 1379.92,1502.56 LED2.1 1379.92,1574.92 LED2.1@1380,1575
PGOOD1: R6.2 U1.27 | length 259.4
  TOP w10: U1.27 U1.27@47.24,179.13 ; U1.27@49.21,177.17 U1.27@47.24,179.13 ; 115,330 99.65,314.65 58.74,314.65 47.24,303.15 U1.27@47.24,179.13 ; 115,331.62 R6.2@115,372.52
PGOOD2: R7.2 U1.14 | length 258.4
  TOP w10: U1.14 47.24,-234.25 78.74,-265.75 196.85,-265.75 R7.2@216.54,-285.43
RT: R14.2 U1.2 | length 155.3
  TOP w10: R14.2 -312.01,127.87 -299.29,115.15 -285.15,115.15 -248.74,78.74 U1.2@-177.17,78.74
SS1: C16.2 U1.29 | length 209.3
  TOP w10: C16.2@-19.68,374.02 -15.75,370.08 U1.29
SS2: R8.1 R9.2 U1.13 | length 211.6
  TOP w10: U1.13 15.75,-232.28 R8.1@68.9,-285.43 ; R8.1 153.54,-301.18 R9.2@157.48,-305.12
VBAT: C1.2 C2.2 C3.2 C4.2 C5.2 C6.2 C15.2 J1.1 Q1.2 Q5.2 R1.2 R19.1 TP1.1 U1.22 | length 1642.2
  TOP w20: R19.1 -1025,1300.59 -709.41,985 v1@-708,985 ; v3(-380,-210) -379.23,-209.23 -379.23,-155.77 R1.2@-380,-155 ; U1.22 C1.2@269.69,47.24 ; C1.2 279.53,49.21 v4(324.8,49.21)
  BOT w20: v3(-380,-210) -340,-250 -160,-250 139.21,49.21 v4@323.82,49.21
  other v1: -748.03,-1062.99 -590.55,-1062.99 -433.07,-1062.99 -748.03,-590.55 -590.55,-590.55 -433.07,-590.55 -866.14,157.48 -748.03,236.22 -1102.36,314.96 -866.14,314.96 -629,320 -984.25,393.7 -748.03,393.7 -511.81,393.7 -866.14,472.44 -629.92,472.44 -787.4,866.14 -708.66,984.25 -551.18,984.25 -393.7,984.25
VCCINT: C10.2 D1.1 D2.1 R6.1 R7.1 U1.19 | length 383.5
  TOP w10: C10.2@299.47,-96.72 C10.2@303.41,-96.72 ; D1.1@403.54,-226.38 D1.1@403.54,-225.39
  TOP w20: U1.19 253.94,-47.24 C10.2@303.41,-96.72 ; C10.2 330.71,-130.91 388.94,-189.13 D2.1@388.94,-324.8
pads on no net: MH1.0 MH2.0 MH3.0 MH4.0

## Polygon pours and split planes (outlines as drawn)
24V on TOP "24V_L01_P000" (solid, pour order 0): 630,1160 694.5,1224.5 1195.5,1224.5 1275,1145 1275,438 1333,380 1360,380 1455,285 1455,90 1390,25 1390,20 835,20 630,225
24V on L3 - POWER (split plane): 1790.93,-1948.41 64.15,-1948.41 64.15,1948.41 1790.93,1948.41
VBAT on L3 - POWER (split plane): 53.96,-1948.41 -1712.19,-1948.41 -1712.19,1948.41 53.96,1948.41
no net on L2 - GND (split plane): 1790.93,-1948.41 -1712.19,-1948.41 -1712.19,1948.41 1790.93,1948.41

## Keep-outs
Keep-Out Layer:
  the board outline again, w5

## Other copper
L3 - POWER (plane layer: these items are gaps in the copper):
  lines w10: 59.06,-1968.5 59.06,1968.5

## Silkscreen, mask and mechanical layers (free items; w line width, h text height)
Polygon:
  lines w10: -360,1020 -765,1020 -855,930 -855,562.32 -937.32,480 -1005,480 -1145,340 -1145,160 -1075,90 -560,90 -470,180 -470,440 -420,490 -345,490 -305,530 -305,985 -340,1020 -355,1020 ; 390,625 390,970 225,1135 225,1610 150,1685 -170,1685 -225,1630 -225,615 -140,530 315,530 390,605 390,630 ; 773.03,1225 693.5,1225 629.92,1161.42 629.92,226.38 836.61,19.69 1387.8,19.69 1456.69,88.58 1456.69,285.43 1362.13,380 1334,380 1275,439 1275,1145 1196,1224 824,1224 ; 777.72,1224.63 820.63,1224.63 ; -845,-1042 -782,-1105 -355,-1105 -295,-1045 -295,-590 -365,-520 -777,-520 -845,-588 -845,-1042 ; -220,-1690 -191,-1719 111,-1719 195,-1635 195,-1345 420,-1120 420,-630 365,-575 -170,-575 -220,-625 -220,-1690 ; 380,1255 420,1215 620,1215 630,1225 680,1225 1077,1225 1115,1263 1115,1400 1070,1445 420,1445 380,1405 380,1255 ; 385,-1445 385,-1320 445,-1260 1000,-1260 1055,-1315 1055,-1430 985,-1500 440,-1500 385,-1445 ; 665,-1190 715,-1240 1185,-1240 1275,-1150 1275,-435 1260,-420 1120,-420 770,-420 665,-525 665,-1190